# EAGLE board KS_Haupt (EAGLE 9.5.2)
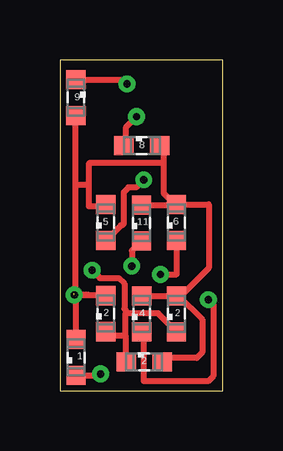
[diagram p0: board, top side]
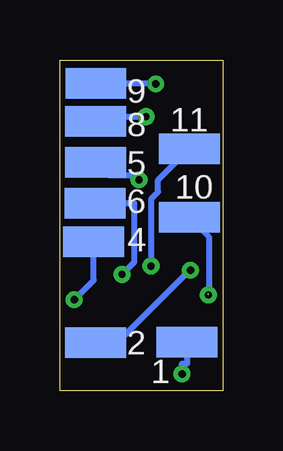
[diagram p1: board, bottom side, seen from below]

Size 6.8 x 13.8 mm. Coordinates in mm from the lower left corner, seen from the top.
Outline: 0,0 6.8,0 6.8,13.8 0,13.8 0,0
Copper layers (1*16): Top 0.035mm / dielectric 1.5mm / Bottom 0.035mm
Design rules "default": minimum track width 10mil, minimum drill 24mil, track to track 8mil, track to pad 8mil, pad to pad 8mil, via to via 8mil, smd to smd 8mil, copper to edge 40mil, drill to drill 8mil, minimum pad ring 10mil, minimum via ring 8mil, stop-mask expansion 4mil, vias tented up to drill 0mil, thermal gap 10mil

## Footprints (pad centres in the part's own frame; a part is rotated, then mirrored left to right if it is on the bottom)
LED_SML0603 = smd 0.8 x 0.8: A 0.75,0; C -0.75,0
SMD1,27-2,54 = smd 1.27 x 2.54: 1 0,0

## Placement (x,y rotation side)
1  [LED_SML0603]  0.68,1.39 90 top
2  [LED_SML0603]  3.52,1.21 0 top
3  [LED_SML0603]  4.87,3.21 90 top
4  [LED_SML0603]  3.42,3.21 90 top
5  [LED_SML0603]  1.92,3.22 90 top
6  [LED_SML0603]  4.87,7.02 90 top
7  [LED_SML0603]  1.92,7.02 90 top
8  [LED_SML0603]  3.42,10.23 0 top
9  [LED_SML0603]  0.67,12.23 270 top
11  [LED_SML0603]  3.4,7 90 top
PAD1  [SMD1,27-2,54]  1.49,2.02 90 bottom
PAD2  [SMD1,27-2,54]  5.31,2.01 270 bottom
PAD4  [SMD1,27-2,54]  5.39,6.21 270 bottom
PAD6  [SMD1,27-2,54]  5.33,7.83 270 bottom
PAD7  [SMD1,27-2,54]  5.32,9.53 270 bottom
PAD8  [SMD1,27-2,54]  5.31,11.23 270 bottom
PAD9  [SMD1,27-2,54]  5.3,12.83 270 bottom
PAD10  [SMD1,27-2,54]  1.39,7.23 90 bottom
PAD11  [SMD1,27-2,54]  1.4,10.1 270 bottom

## Library data of the parts
1-9 11 = eagle-ltspice; SPICEMODEL: NONE; SPICEPREFIX: D; SPICETYPE: diode
PAD1 PAD2 PAD4 PAD6-PAD11 = wirepad

## Nets
N$1: 1.C PAD1.1
N$2: 2.C 3.C 5.C PAD2.1
N$3: 11.C PAD11.1
N$4: 4.C PAD4.1
N$6: 6.C PAD6.1
N$7: 7.C PAD7.1
N$8: 8.C PAD8.1
N$9: 9.C PAD9.1
N$10: 1.A 2.A 3.A 4.A 5.A 6.A 7.A 8.A 9.A 11.A PAD10.1

## Tracks (layer width: path | path; a pad name or v marks a point on that pad's centre or on a via)
N$1  (via drill 0.3)
  Top 0.254: 1.C 1.7,0.64 v1.7,0.7
  Bottom 0.254: PAD1.1 1.49,1.14 1.7,1.14 v1.7,0.7
N$2  (via drill 0.3)
  Top 0.254: 1.44,4.93 v1.34,5.03 1.67,4.7 2.46,4.7 2.69,4.47 2.69,3.42 2.74,3.37 2.74,3.23 | 2.74,2.29 2.74,1.37 2.C | 2.74,2.29 2.14,2.29 5.C | 3.C 4.1,3.23 2.74,3.23 | 2.74,2.29 2.74,3.23
  Bottom 0.254: v1.34,5.03 1.37,5.03 4.34,2.06 5.26,2.06 PAD2.1
N$3  (via drill 0.3)
  Top 0.254: 11.C 3,5.85 v3,5.2
  Bottom 0.254: PAD11.1 2.7,8.8 2.7,8.29 2.99,8 v2.99,5.21 v3,5.2
N$4  (via drill 0.3)
  Top 0.254: 4.C 3.5,2.38 3.5,0.4 6.19,0.4 6.4,0.61 6.4,3.6 v6.2,3.8
  Bottom 0.254: v6.2,3.8 5.39,4.61 PAD4.1
N$6  (via drill 0.3)
  Top 0.254: v4.2,4.86 4.87,4.86 6.C
  Bottom 0.254: PAD6.1 3.7,7.83 3.7,5.36 v4.2,4.86
N$7  (via drill 0.3)
  Top 0.254: 7.C 2.55,6.9 2.6,6.9 2.67,6.97 2.67,8.29 2.86,8.48 3.18,8.48 v3.5,8.8
  Bottom 0.254: v3.5,8.8 3.5,9 4.79,9 PAD7.1
N$8  (via drill 0.3)
  Top 0.254: v3.2,11.43 2.74,10.97 2.74,10.29 8.C
  Bottom 0.254: v3.2,11.43 5.03,11.43 5.19,11.27 PAD8.1
N$9  (via drill 0.3)
  Top 0.254: 9.C 2.8,12.98 2.8,12.9 2.74,12.8 v2.8,12.8
  Bottom 0.254: PAD9.1 2.83,12.83 v2.8,12.8
N$10  (via drill 0.3)  (1 unrouted)
  Top 0.254: 3.42,3.87 4.A 3.A | 2.A 4.34,1.37 5.71,1.37 5.94,1.6 5.94,2.97 4.96,3.96 3.A | 4.34,9.5 4.34,8.23 4.8,7.77 6.A | 4.34,9.5 4.34,10.06 8.A | 5.A 1.91,4 v0.6,4 | 1.83,7.54 7.A 1.85,7.7 1.2,7.7 1.2,8.6 | 3.A 5.06,3.96 6.21,5.12 6.21,7.77 6.A | 4.34,9.5 1.24,9.5 1.2,9.46 1.2,8.6 | 1.18,4 v0.6,4 | 9.A 0.64,11.45 0.64,8.6 | v0.6,4 0.64,4.04 0.64,8.6 | 0.64,8.6 1.2,8.6 | 1.A 0.68,3.92 v0.6,4 | 11.A 4.85,7.75 6.A
  Bottom 0.254: 0.6,4.07 | PAD10.1 0.59,6.43 v0.59,4.01 v0.6,4

## Text on the board
tNames: 9 | 8 | 5 | 11 | 4 | 2 | 1 | 2
bNames: 9 | 11 | 8 | 5 | 10 | 6 | 4 | 2 | 1